# Altium PCB Force Sensor Tests PCB.PcbDoc
Units mm, origin at the board's own origin, x right, y up, seen from the top; angles counter-clockwise.
Board outline 90 x 90 mm, 2 copper layers (Top Layer, Bottom Layer); 1 components, 8 nets, 16 pads, 0 vias.
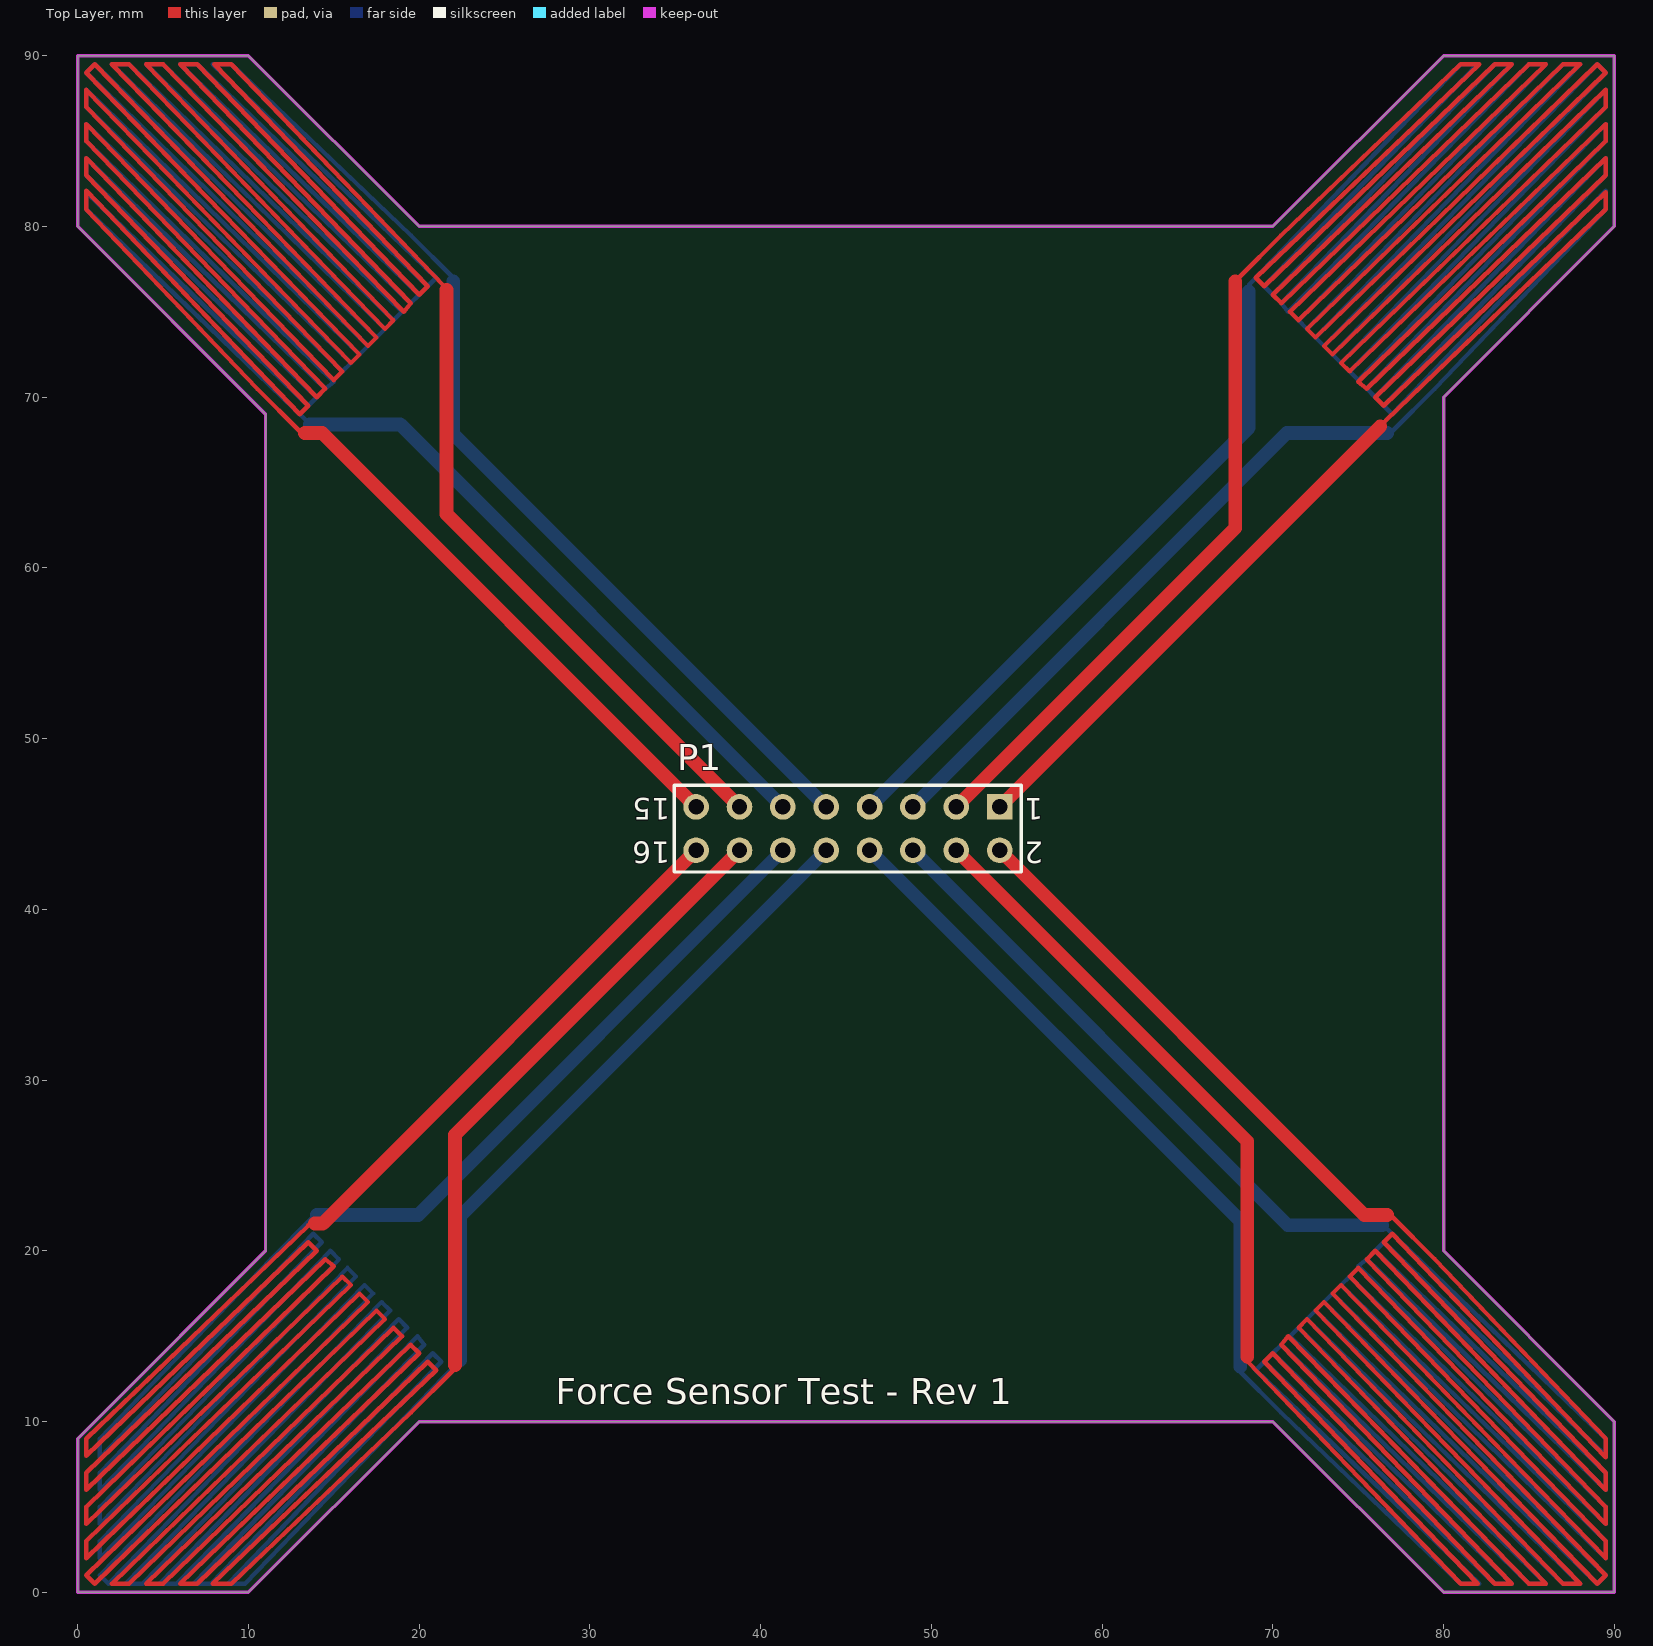
[diagram p0: Top Layer view]
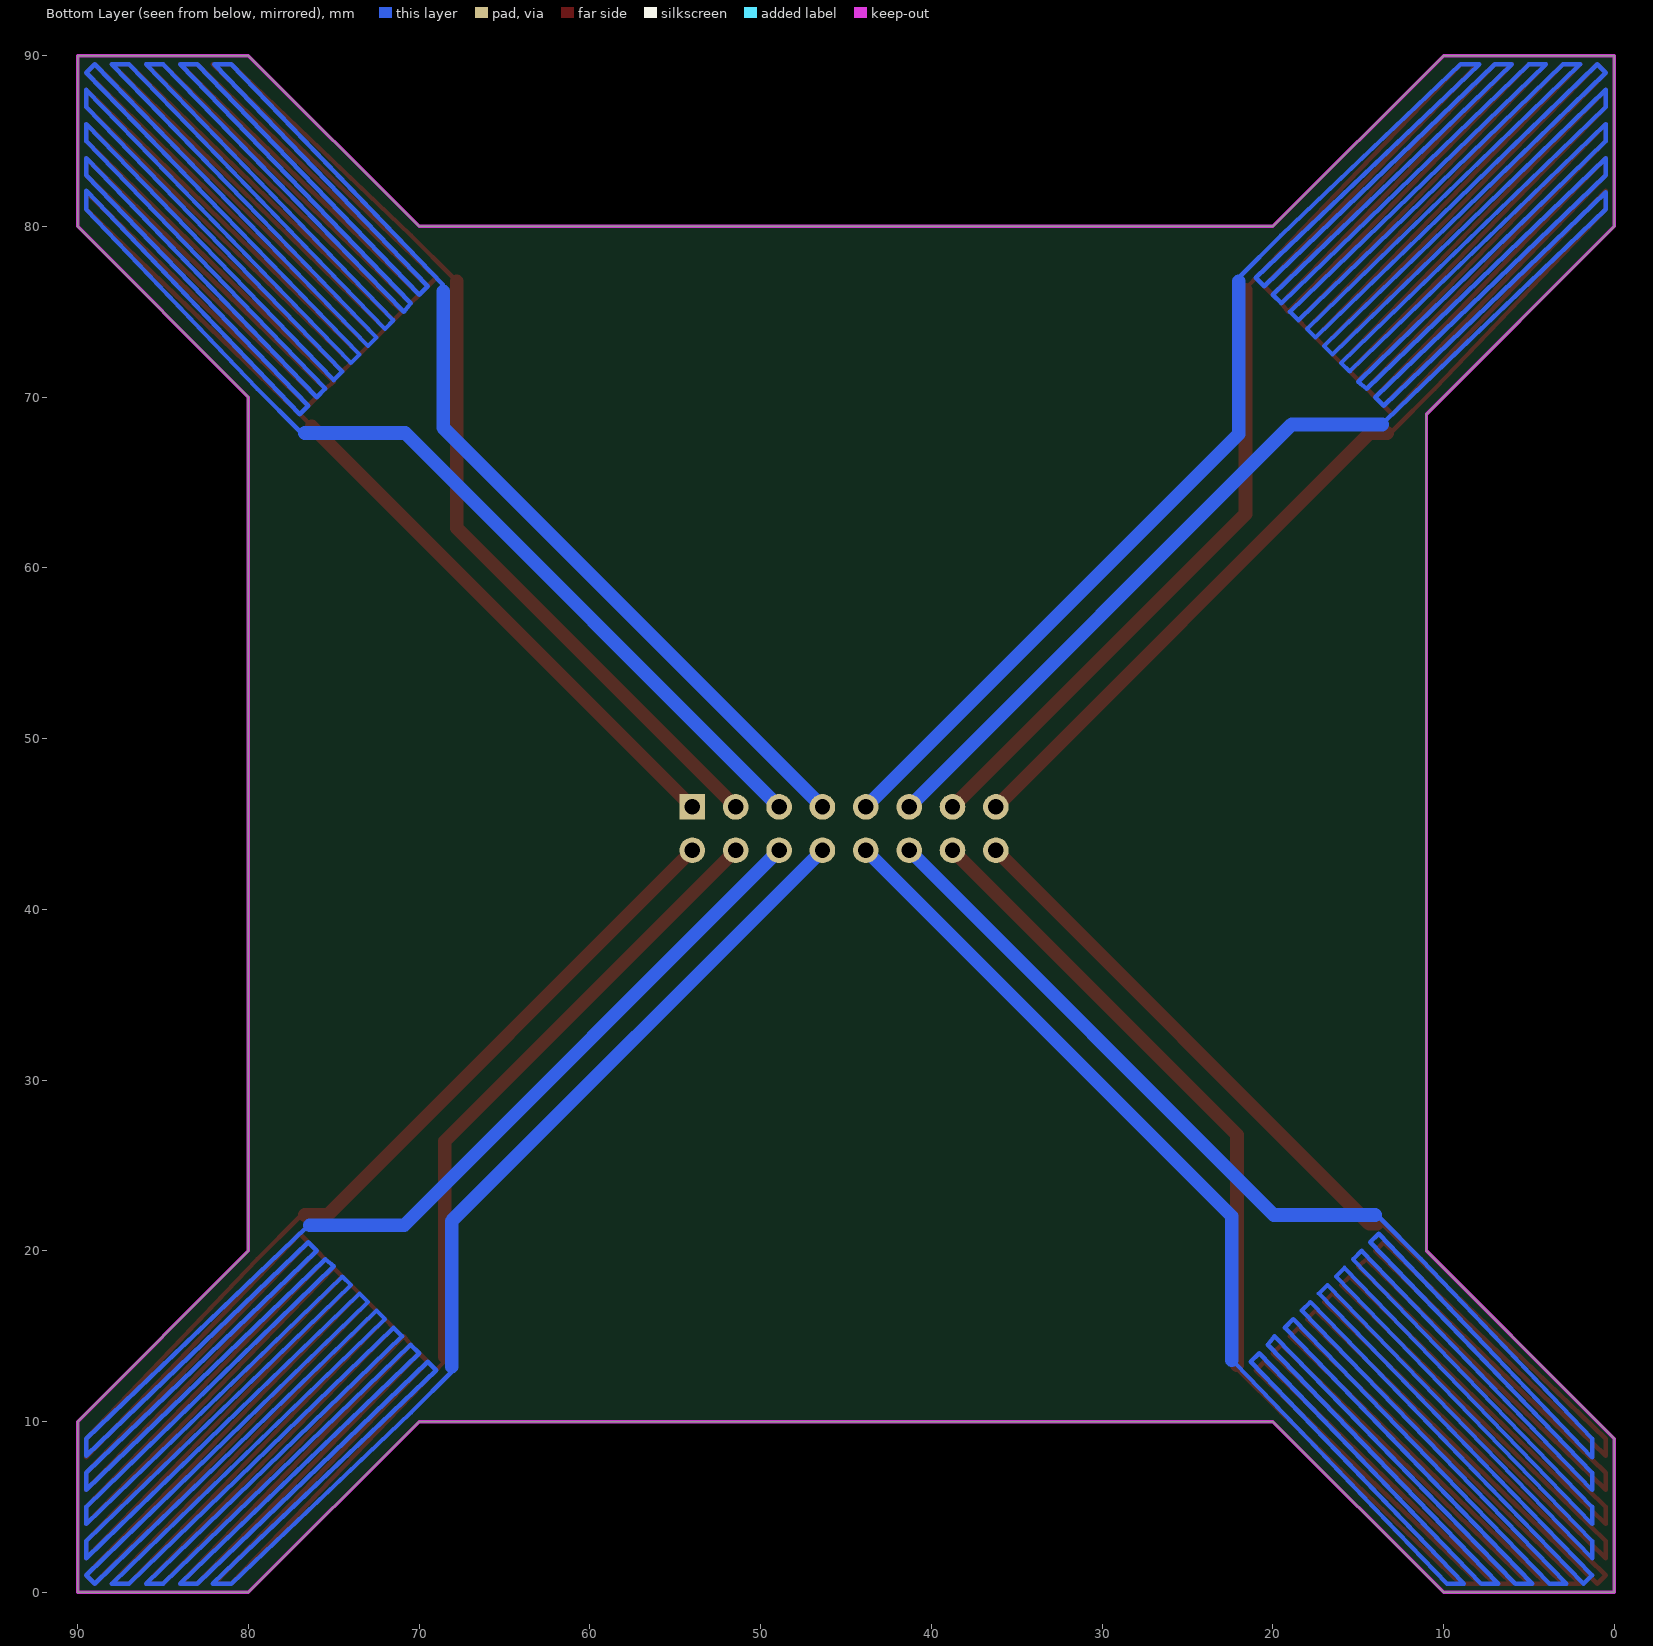
[diagram p1: Bottom Layer view, seen from below]

## Layer stack, top to bottom
Top Solder: solder mask 0.0102, Solder Resist, Dk 3.5
Top Layer: signal copper 0.0356
Dielectric 1: dielectric 0.32, FR-4, Dk 4.8
Bottom Layer: signal copper 0.0356
Bottom Solder: solder mask 0.0102, Solder Resist, Dk 3.5

## Board outline
0,0 0,9 11,20 11,69 0,80 0,90 10,90 20,80 70,80 80,90 90,90 90,80 80,70 80,20 90,10 90,0 80,0 70,10 20,10 10,0

## Design rules (kind name [scope] priority, off if disabled: settings)
Clearance [All] p1: gap=0.254
PolygonConnect [All] p1: connectstyle=Relief reliefconductorwidth=0.254 reliefentries=4 polygonreliefangle="90 Angle" airgapwidth=0.254
RoutingVias [All] p1: holewidth=0.711 width=1.27 viastyle="Through Hole" minholewidth=0.711 minwidth=1.27 maxholewidth=0.711 maxwidth=1.27
SolderMaskExpansion [All] p1: expansion=0.102
Width [All] p1: maxlimit=1 minlimit=0.254 preferedwidth=0.8
30 further rules are at their usual default settings.

## Components (designator, comment, footprint, x,y, rotation, side; value= is the part's Value field where it differs from the comment)
P1 "Header 8" HDR2X8 54,46 r180 top

## Footprints (in the part's own frame and the unit in brackets; to place one, negate y for a bottom-side part, rotate by r counter-clockwise, add the part's x,y. Pads: shape width x height; smd on the part's side, far side on the other; paste and mask are expansions set on the pad)
HDR2X8 [mm] "Connector; Header; 8x2 Position"
  rect 1.5x1.5 hole 0.9: 1(0,0)
  round 1.5 hole 0.9: 2(0,2.54) 3(2.54,0) 4(2.54,2.54) 5(5.08,0) 6(5.08,2.54) 7(7.62,0) 8(7.62,2.54) 9(10.16,0) 10(10.16,2.54) 11(12.7,0) 12(12.7,2.54) 13(15.24,0) 14(15.24,2.54) 15(17.78,0) 16(17.78,2.54)
  silkscreen extent -1.27,-1.27 19.05,3.81

## Part data
P1: "Header, 8-Pin"

## Nets (pads, with @x,y where several pads share a name; then routed paths per layer and width w, separated by ;. In a path a pad name is that pad's centre, name@x,y a point inside that pad or via, vN(x,y) a via of type N, cw(c..) or ccw(c..) an arc to the next point about the centre after c; other vN are vias at no path point)
Sensor1: P1.1 P1.3 | length 447.7
  Top Layer w0.254: 68,77 70.5,79.5 81,89.5 82.1,89.5 69,77 69.5,76.5 83,89.5 84,89.5 70,76 70.5,75.5 85,89.5 86,89.5 71,75 71.5,74.5 87,89.5 88,89.5 72,74 72.5,73.5 89,89.5 89.5,89 73,73 73.5,72.5 89.5,88 89.5,87 74,72 74.5,71.5 89.5,86 89.5,85 75,70.9 75.5,70.5 89.5,84 89.5,83 76,70 76.5,69.5 89.5,82 89.5,81 76.6,68.616
  Top Layer w0.8: P1.3 67.8,62.34 67.8,76.8 ; P1.1 76.3,68.3
Sensor2: P1.2 P1.4 | length 447
  Top Layer w0.254: 68.51,13.51 81,0.5 82,0.5 69.5,13.5 70,14 83,0.5 84,0.5 70.5,14.5 70.9,15 85,0.5 86,0.5 71.5,15.5 72,16 87,0.5 88,0.5 72.5,16.5 73,17 89,0.5 89.5,1 73.5,17.5 74,18 89.5,2 89.5,3 74.5,18.5 75,19 89.5,4 89.5,5 75.5,19.5 76,20 89.5,6 89.5,7 76.5,20.5 77,21 89.5,7.9 89.5,9 79.5,19.5 77,22
  Top Layer w0.8: P1.4 68.5,26.42 68.5,13.8 ; P1.2 75.36,22.1 76.7,22.1
Sensor3: P1.13 P1.15 | length 448.2
  Top Layer w0.254: 13,68 10.5,70.5 0.5,81 0.5,82.1 13,69 13.5,69.5 0.5,83 0.5,84 14,70 14.5,70.5 0.5,85 0.5,86 15,71 15.5,71.5 0.5,87 0.5,88 16,72 16.5,72.5 0.5,89 1,89.5 17,73 17.5,73.5 2,89.5 3,89.5 18,74 18.5,74.5 4,89.5 5,89.5 19.1,75 19.5,75.5 6,89.5 7,89.5 20,76 20.5,76.5 8,89.5 9,89.5 21.49,76.49
  Top Layer w0.8: 13.3,67.9 14.32,67.9 P1.15 ; 21.6,76.3 21.6,63.16 P1.13
Sensor4: P1.14 P1.16 | length 447.2
  Top Layer w0.254: 13.51,21.49 0.5,9 0.5,8 13.5,20.5 14,20 0.5,7 0.5,6 14.5,19.5 15,19.1 0.5,5 0.5,4 15.5,18.5 16,18 0.5,3 0.5,2 16.5,17.5 17,17 0.5,1 1,0.5 17.5,16.5 18,16 2,0.5 3,0.5 18.5,15.5 19,15 4,0.5 5,0.5 19.5,14.5 20,14 6,0.5 7,0.5 20.5,13.5 21,13 7.9,0.5 9,0.5 19.5,10.5 22,13
  Top Layer w0.8: 13.9,21.6 14.36,21.6 P1.16 ; 22.1,13.3 22.1,26.8 P1.14
Sensor5: P1.5 P1.7 | length 454.9
  Bottom Layer w0.254: 68.616,76.6 81,89.5 82,89.5 69.5,76.5 70,76 83,89.5 84,89.5 70.5,75.5 70.9,75 85,89.5 86,89.5 71.5,74.5 72,74 87,89.5 88,89.5 72.5,73.5 73,73 89,89.5 89.5,89 73.5,72.5 74,72 89.5,88 89.5,87 74.5,71.5 75,71 89.5,86 89.5,85 75.5,70.5 76,70 89.5,84 89.5,83 76.5,69.5 77,69 89.5,82.1 89.5,81 79.5,70.5 77,68
  Bottom Layer w0.8: P1.7 68.6,68.22 68.6,76.2 ; P1.5 70.82,67.9 76.7,67.9
Sensor6: P1.6 P1.8 | length 454.4
  Bottom Layer w0.254: 68,13 70.5,10.5 81,0.5 82.1,0.5 69,13 69.5,13.5 83,0.5 84,0.5 70,14 70.5,14.5 85,0.5 86,0.5 71,15 71.5,15.5 87,0.5 88,0.5 72,16 72.5,16.5 89,0.5 89.5,1 73,17 73.5,17.5 89.5,2 89.5,3 74,18 74.5,18.5 89.5,4 89.5,5 75,19.1 75.5,19.5 89.5,6 89.5,7 76,20 76.5,20.5 89.5,8 89.5,9 76.6,21.384
  Bottom Layer w0.8: P1.8 68.1,21.74 68.1,13.2 ; P1.6 70.88,21.5 76.4,21.5
Sensor7: P1.10 P1.12 | length 453.5
  Bottom Layer w0.254: 13.8,22 11.3,19.5 1.3,9 1.3,7.9 13.8,21 14.3,20.5 1.3,7 1.3,6 14.8,20 15.3,19.5 1.3,5 1.3,4 15.8,19 16.3,18.5 1.3,3 1.3,2 16.8,18 17.3,17.5 1.3,1 1.8,0.5 17.8,17 18.3,16.5 2.8,0.5 3.8,0.5 18.8,16 19.3,15.5 4.8,0.5 5.8,0.5 19.9,15 20.3,14.5 6.8,0.5 7.8,0.5 20.8,14 21.3,13.5 8.8,0.5 9.8,0.5 22.184,13.4
  Bottom Layer w0.8: 14,22.1 19.94,22.1 P1.12 ; 22.4,13.6 22.4,22.02 P1.10
Sensor8: P1.9 P1.11 | length 455.4
  Bottom Layer w0.254: 13.4,68.616 0.5,81 0.5,82 13.5,69.5 14,70 0.5,83 0.5,84 14.5,70.5 15,70.9 0.5,85 0.5,86 15.5,71.5 16,72 0.5,87 0.5,88 16.5,72.5 17,73 0.5,89 1,89.5 17.5,73.5 18,74 2,89.5 3,89.5 18.5,74.5 19,75 4,89.5 5,89.5 19.5,75.5 20,76 6,89.5 7,89.5 20.5,76.5 21,77 7.9,89.5 9,89.5 19.5,79.5 22,77
  Bottom Layer w0.8: 13.6,68.4 18.9,68.4 P1.11 ; 22,76.8 22,67.84 P1.9

## Keep-outs
Keep-Out Layer:
  lines w0.2: 70,10 20,10 10,0 0,0 0,9 1,10 11,20 11,69 0,80 0,90 10,90 20,80 70,80 80,90 90,90 90,80 80,70 80,20 90,10 90,0 80,0 70,10 ; 70,10 70,10

## Silkscreen, mask and mechanical layers (free items; w line width, h text height)
Top Overlay:
  text "Force Sensor Test - Rev 1" at 28,11 h1.52

## Text inside footprints (layer, text, board x,y; h text height)
P1: Top Overlay "2" at 56.54,43.968 h1.27 r180; Top Overlay "1" at 56.54,46.508 h1.27 r180; Top Overlay "15" at 34.696,46.508 h1.27 r180; Top Overlay "16" at 34.696,43.968 h1.27 r180